# Altium PCB NS6202_V4.1.PcbDoc (part 1 of 2)
Units mm, origin at the board's own origin, x right, y up, seen from the top; angles counter-clockwise.
Board outline 63.75 x 63.6 mm, 4 copper layers (Top, VCC, GND, Bottom), stack 0.776 mm thick; 132 components, 151 nets, 534 pads, 404 vias.
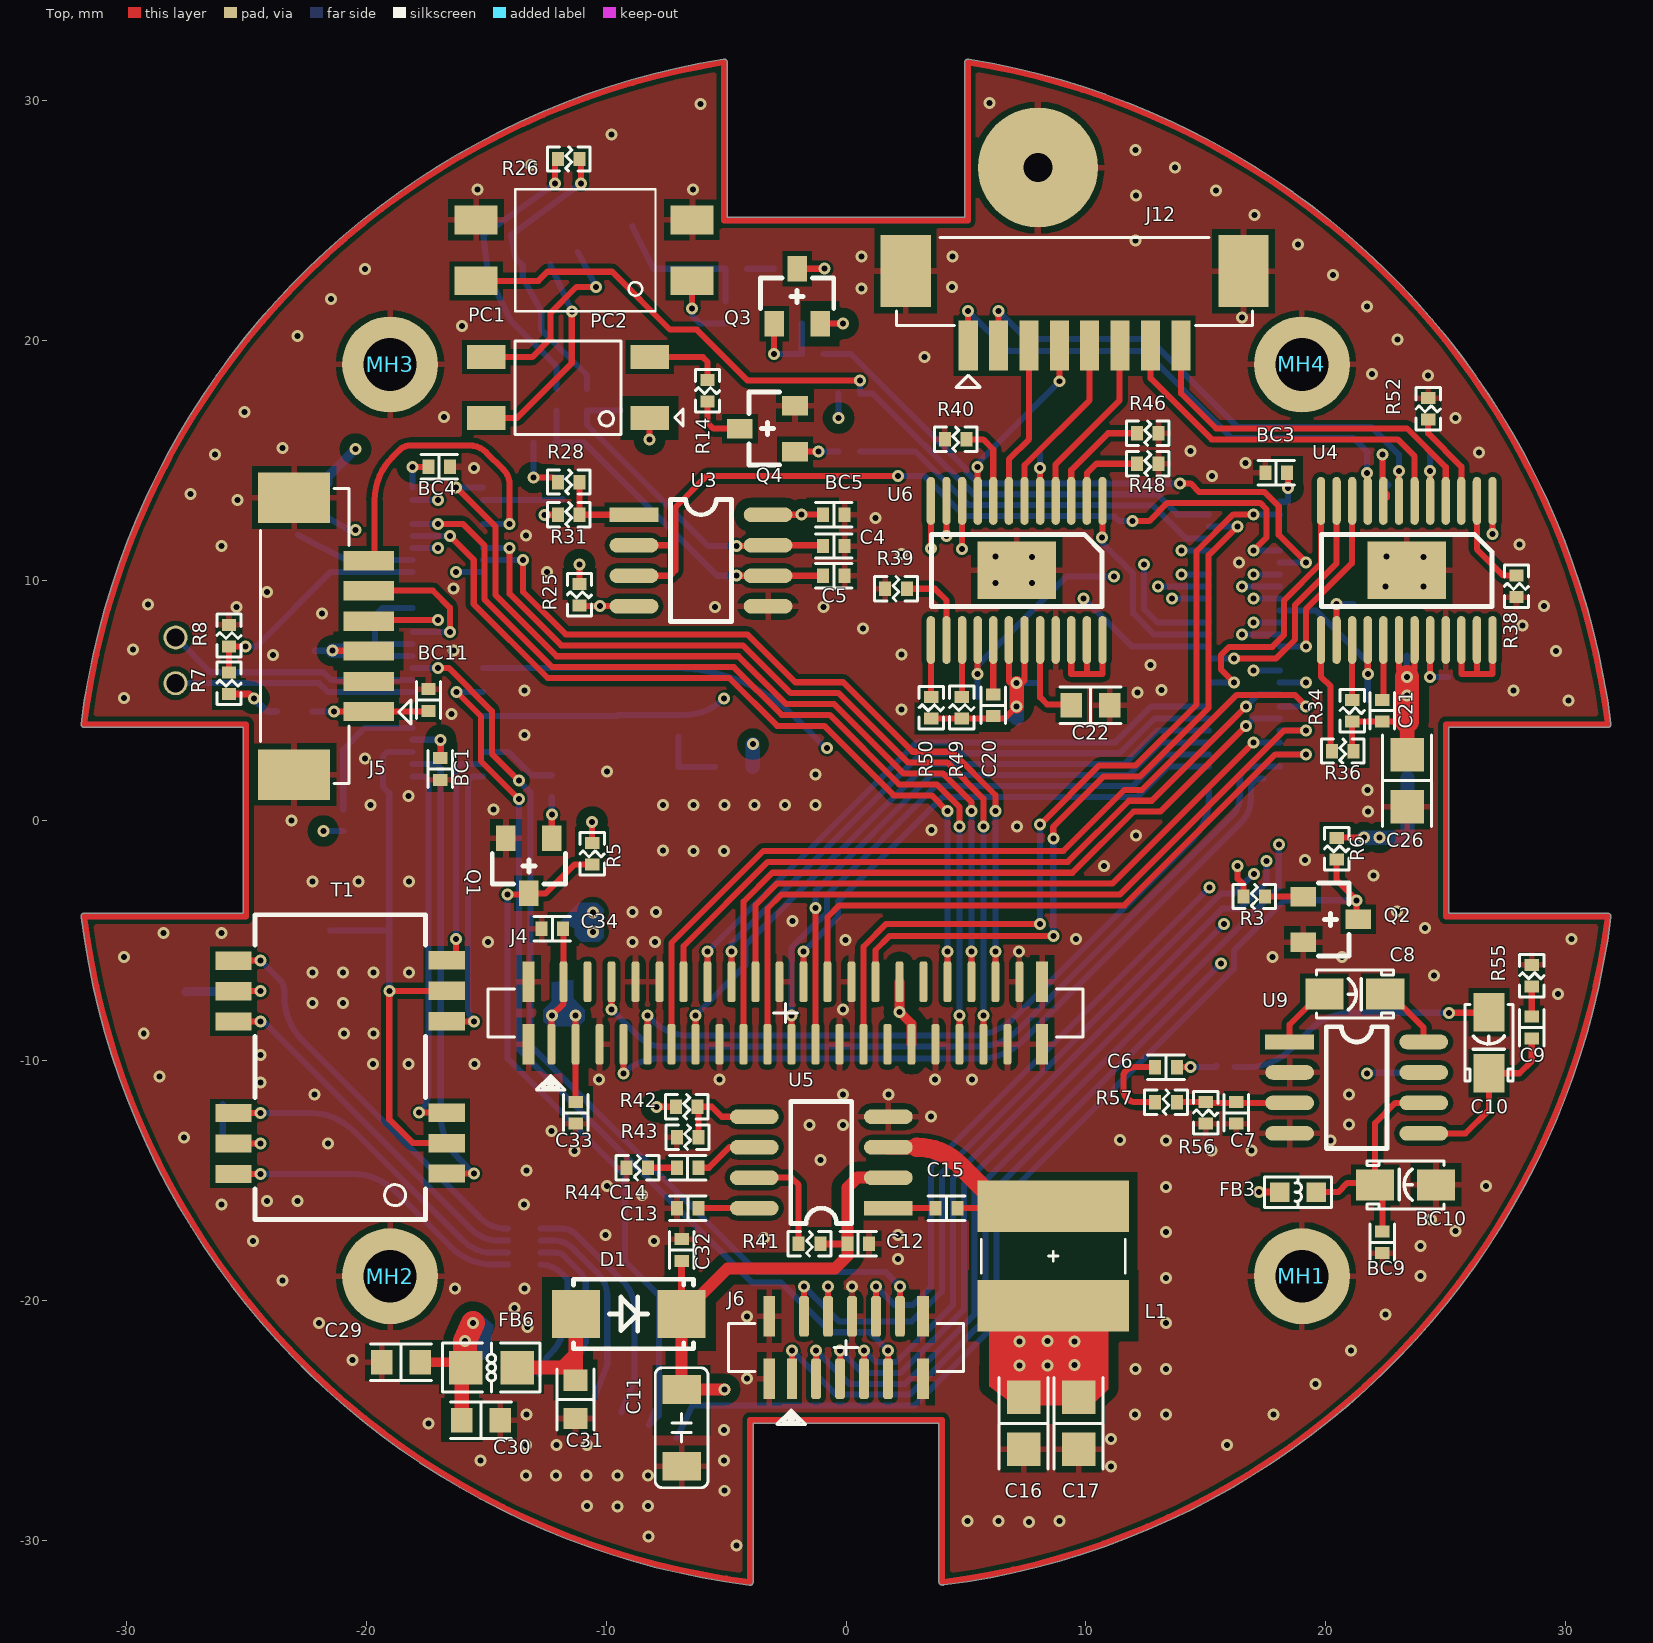
[diagram p0: Top view]
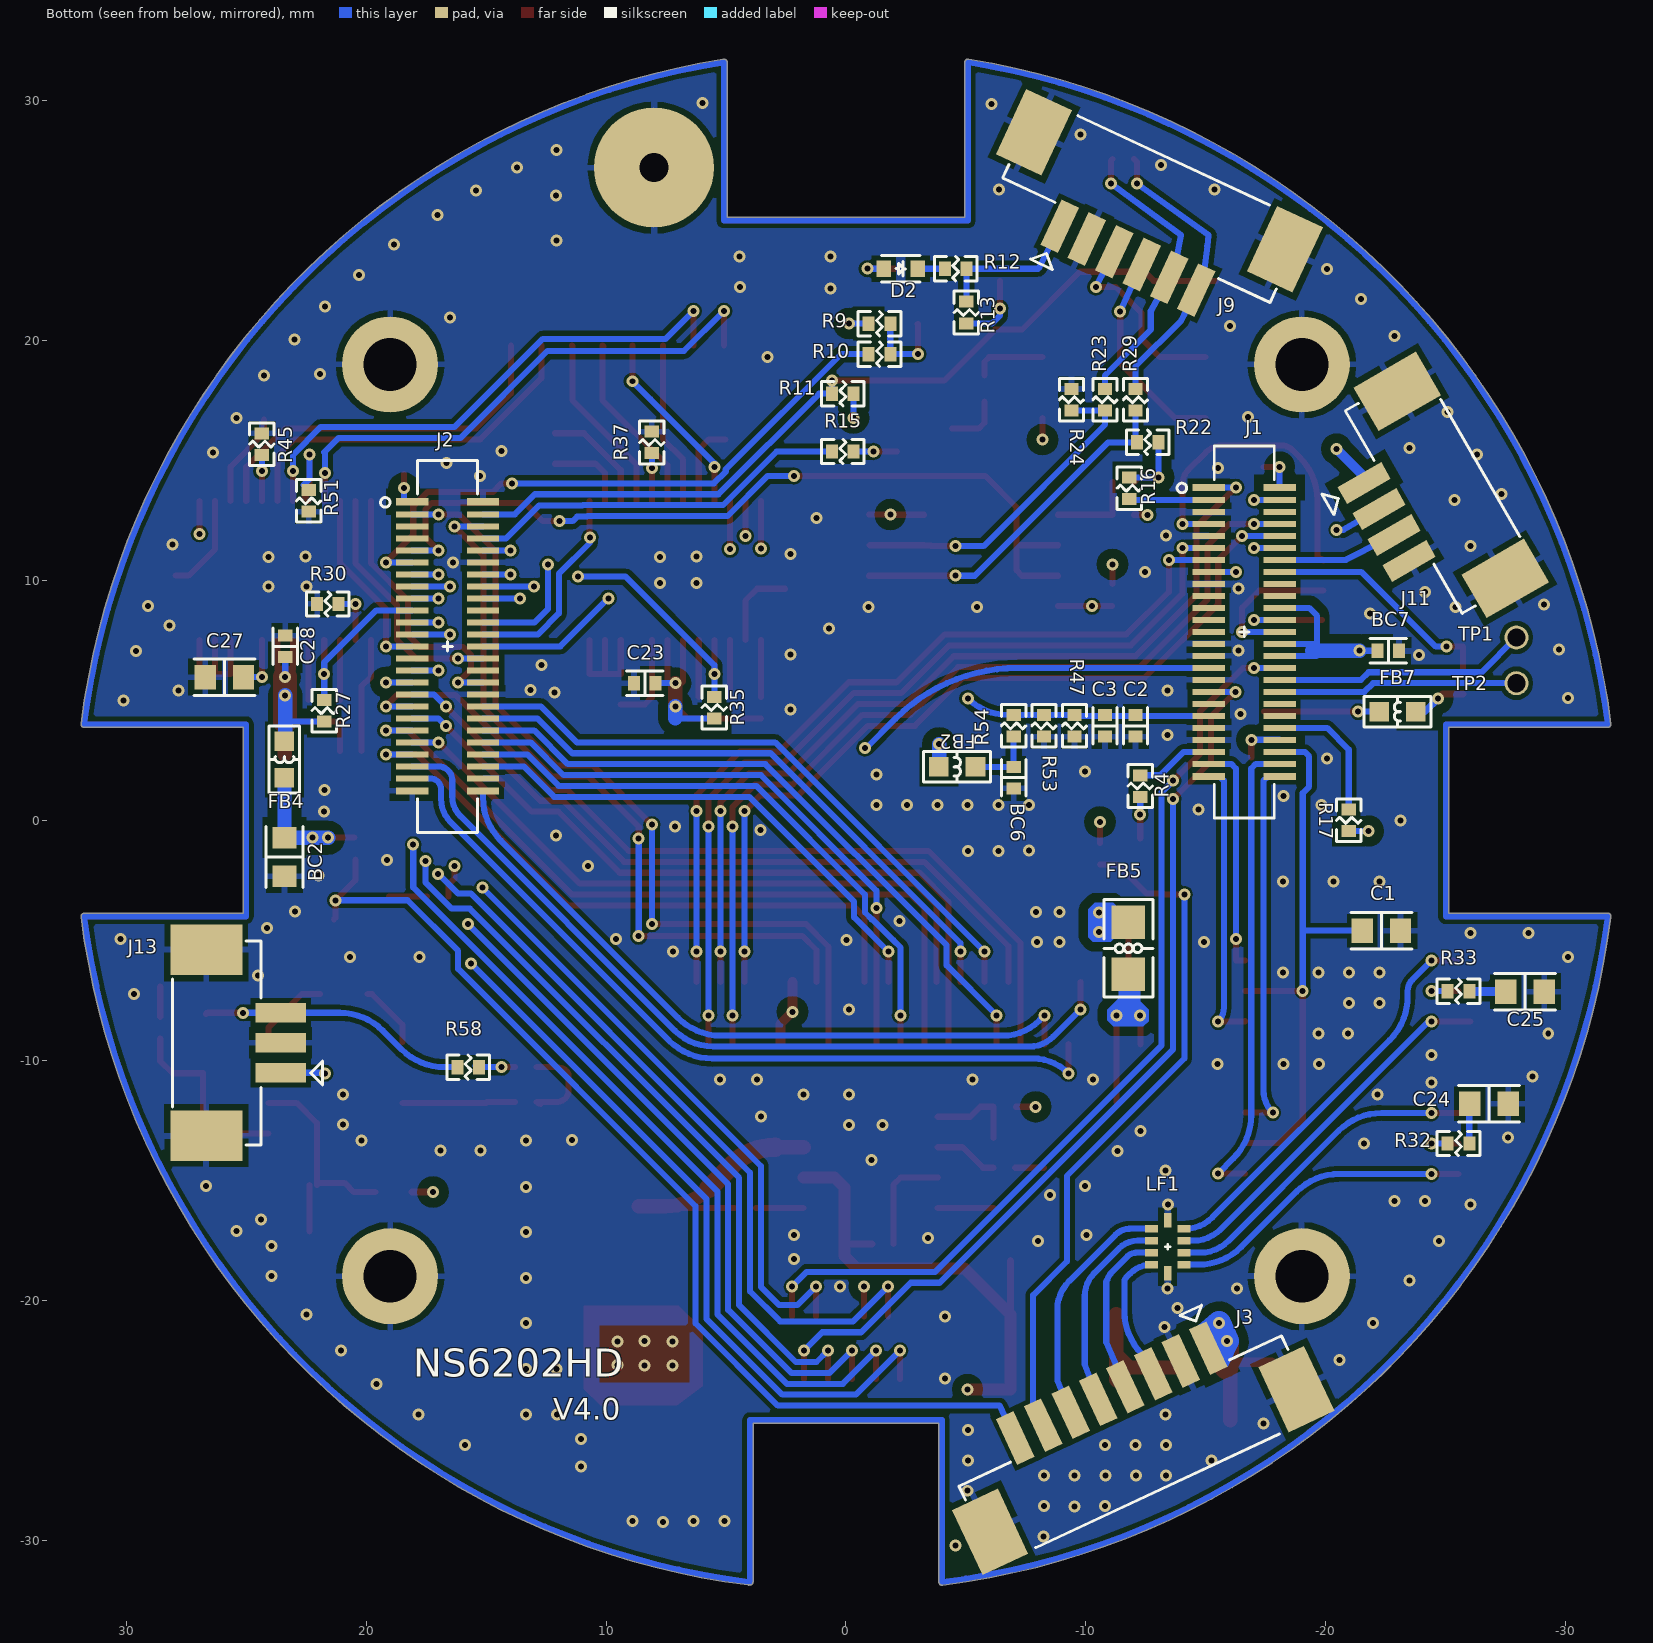
[diagram p1: Bottom view, seen from below]
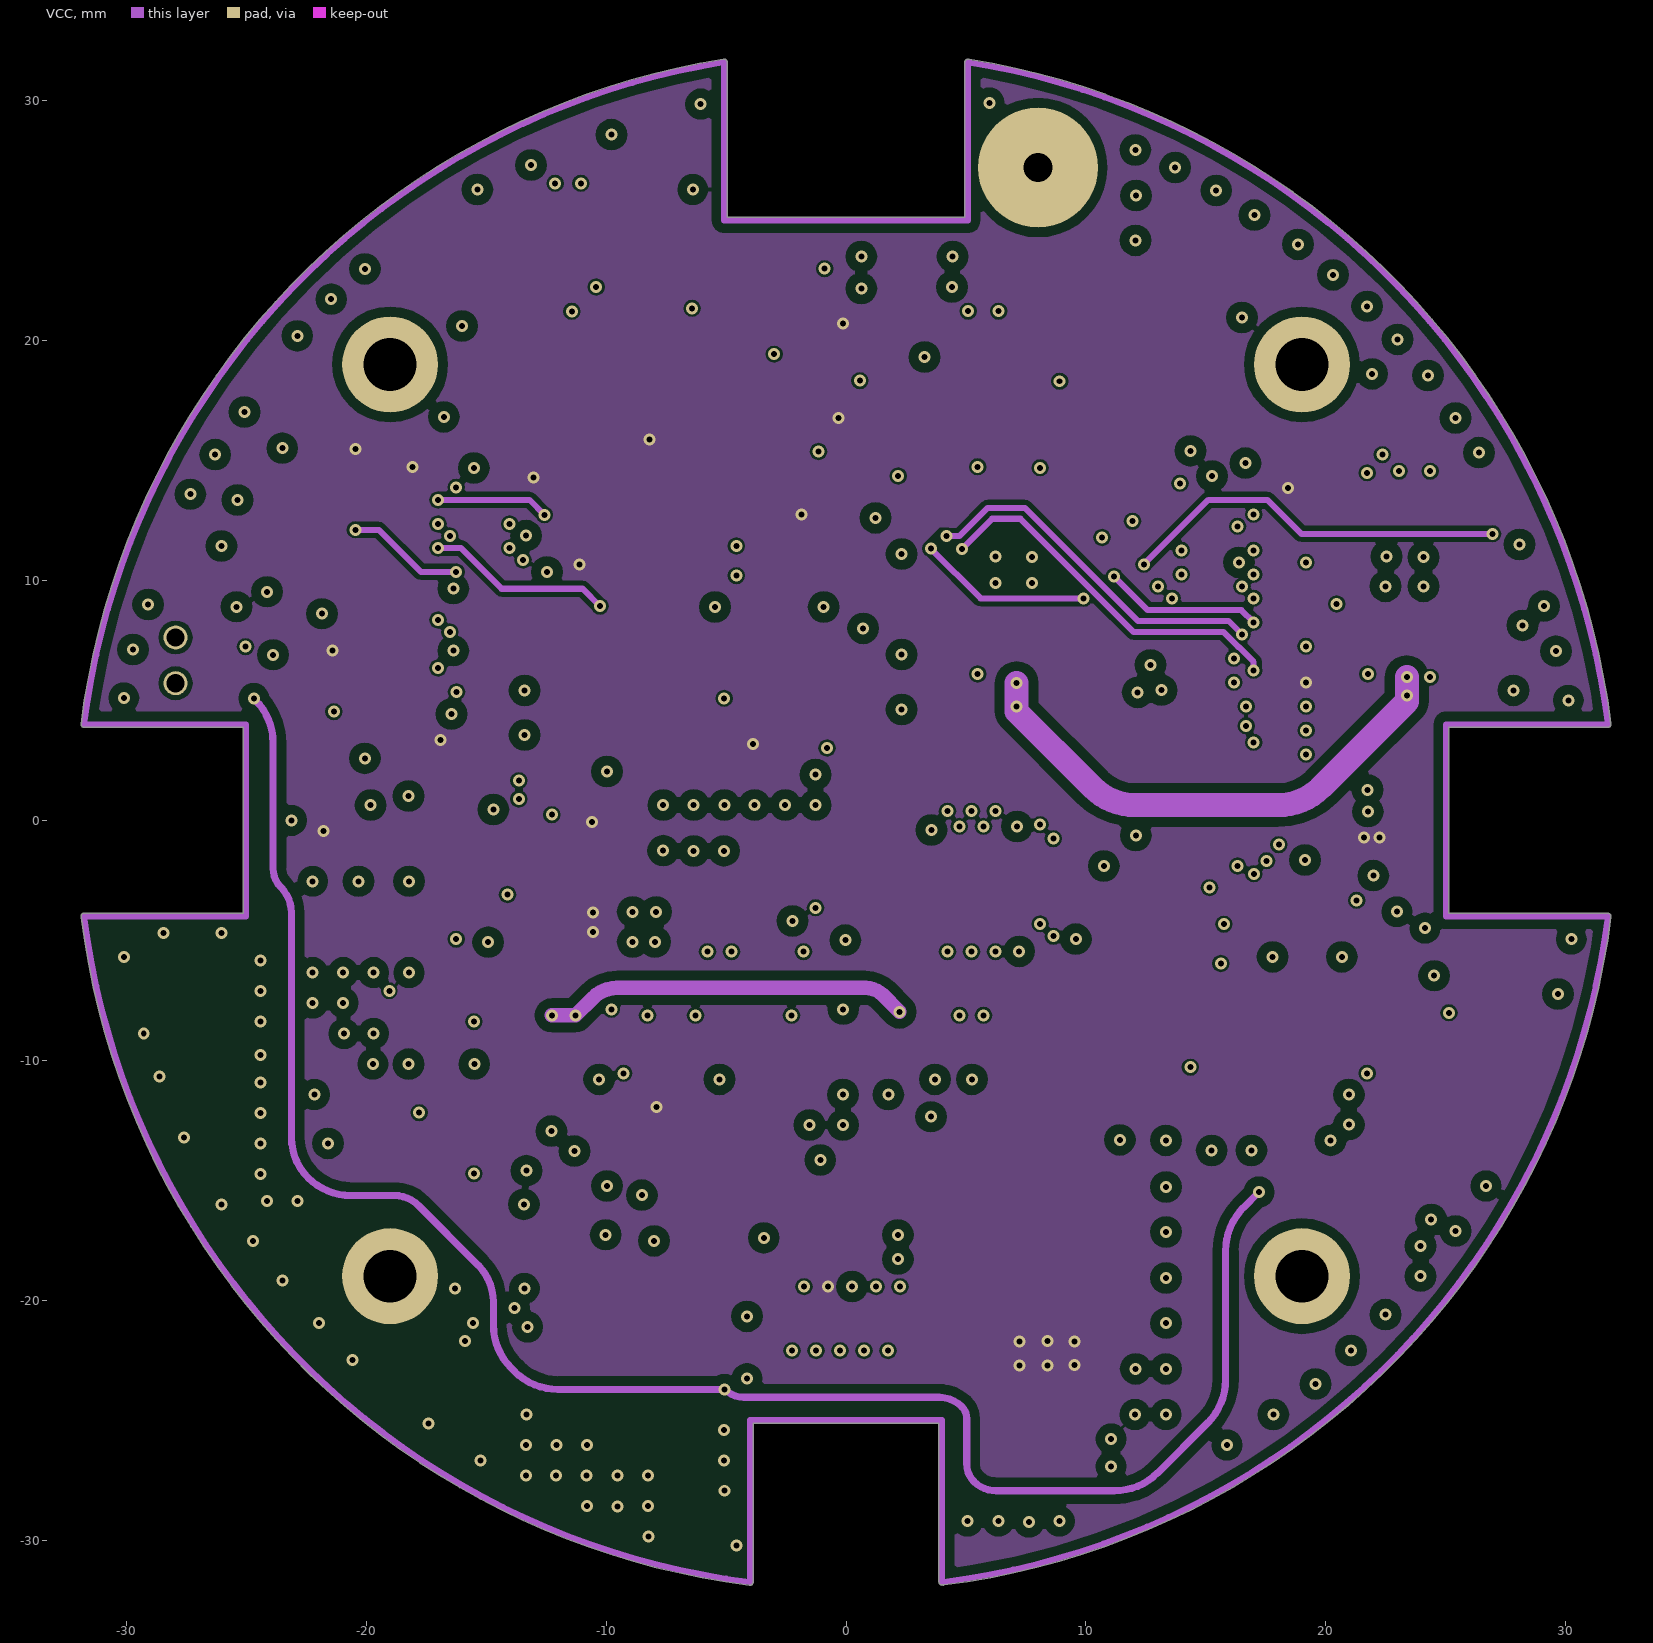
[diagram p2: VCC]
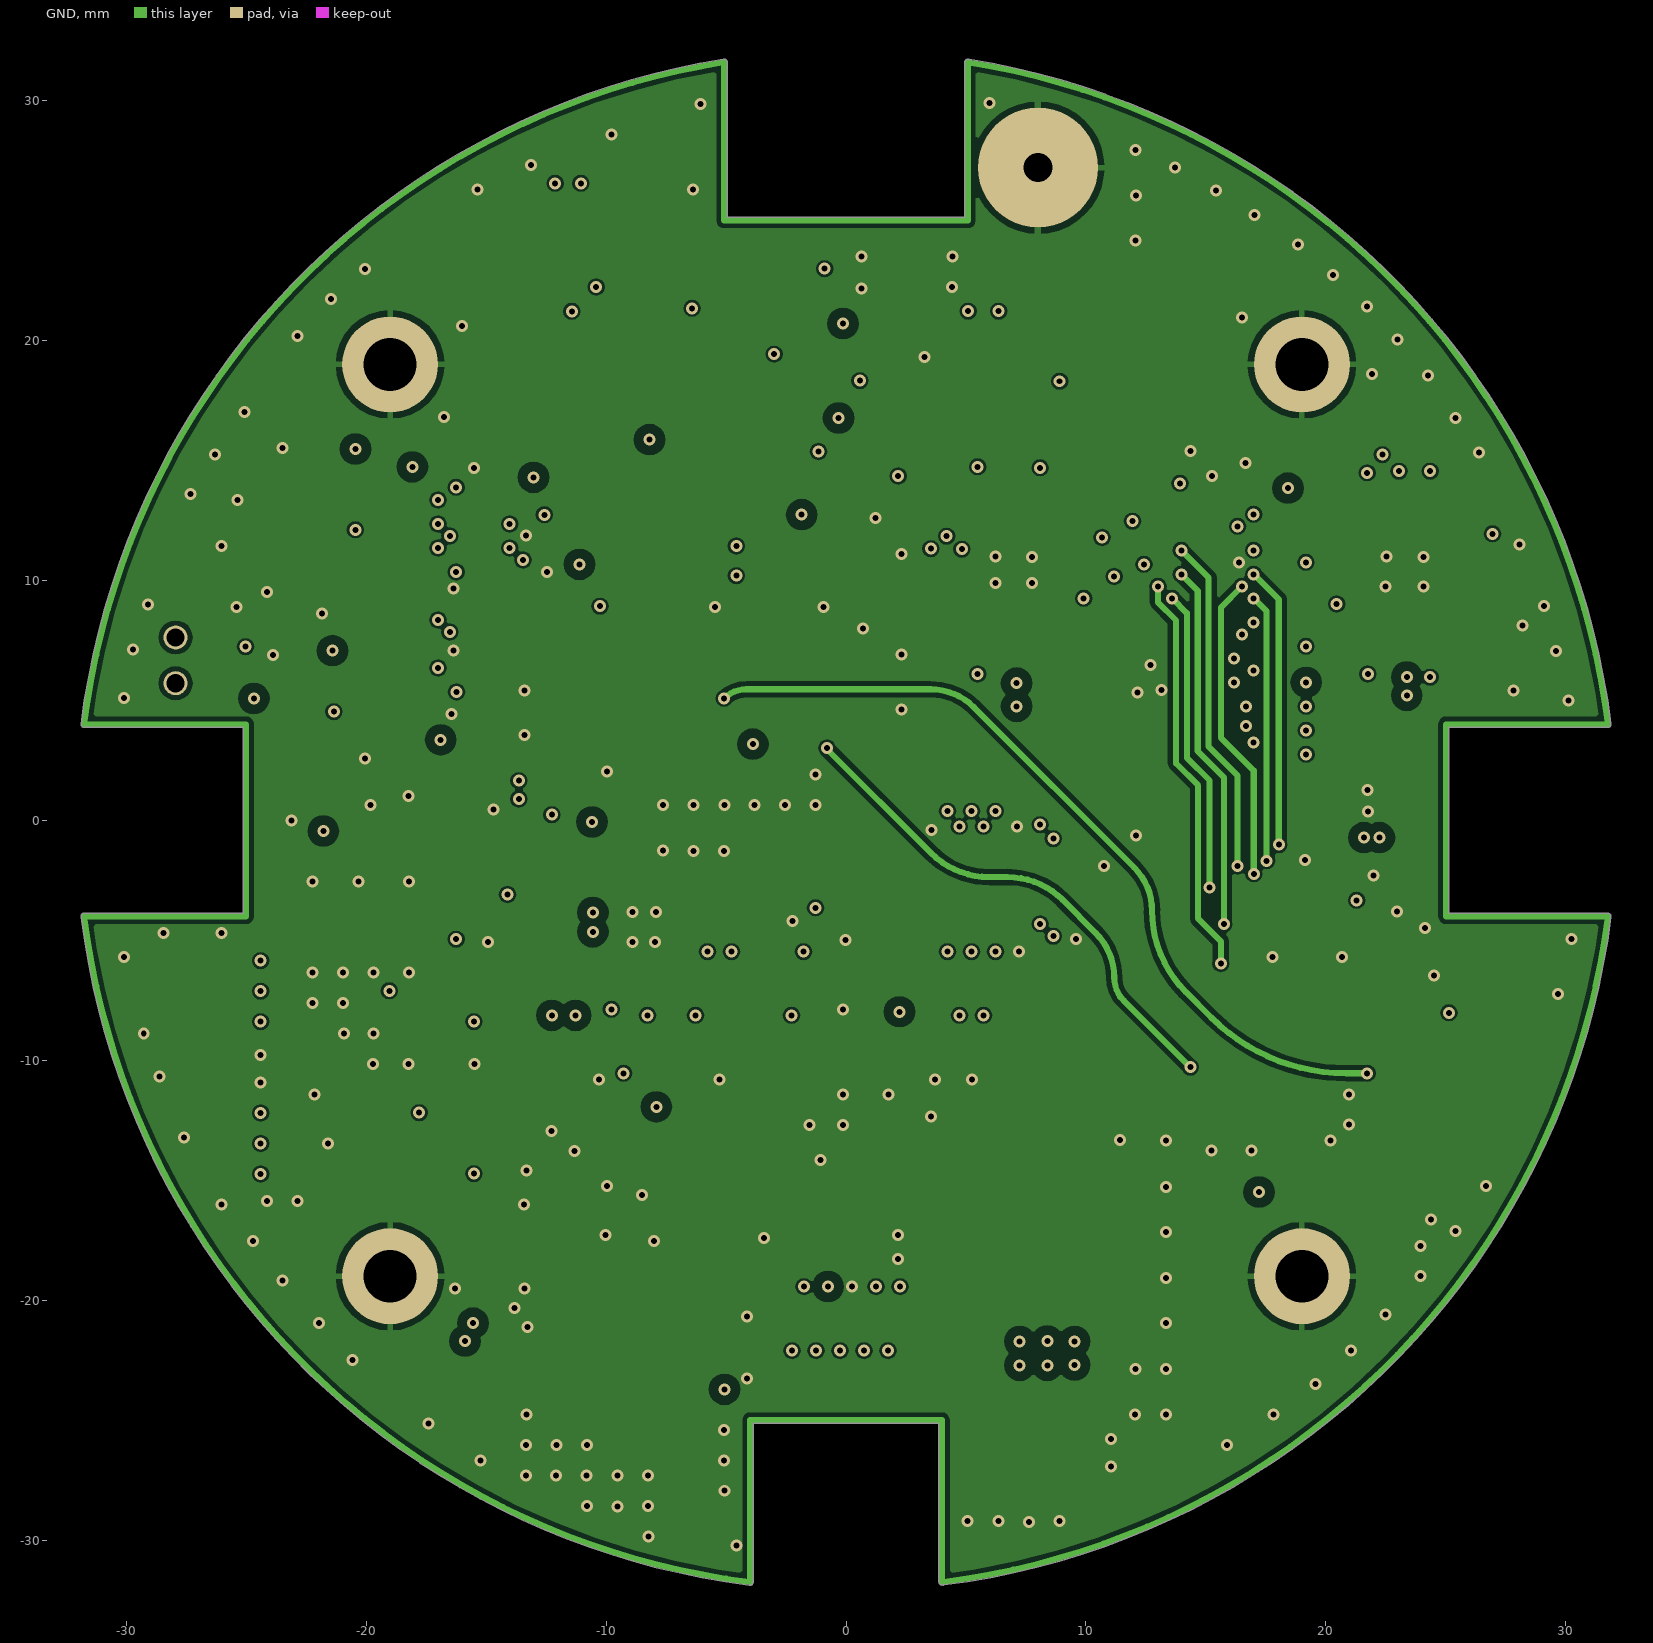
[diagram p3: GND]

## Layer stack, top to bottom
Solder Mask Top: solder mask 0.0102, Solder Resist, Dk 3.5
Top: signal copper 0.0343
Dielectric 1: core 0.254, FR-4, Dk 4.2
VCC: signal copper 0.036
Dielectric 3: prepreg 0.127, Dk 4.2
GND: signal copper 0.036
Dielectric 2: core 0.254, Dk 4.2
Bottom: signal copper 0.0343
Solder Mask Bottom: solder mask 0.0102, Solder Resist, Dk 3.5

## Board outline
-4.035,-31.873 ccw(c-4.019,-31.747) -4.01,-31.874 ccw(c-4,-31.747) -3.873,-31.747 -3.873,-25.127 3.873,-25.127 3.873,-31.741 ccw(c4,-31.741) 4.031,-31.864 ccw(c4.063,-31.741) 4.079,-31.867 ccw(c0,0) 31.873,-4.035 ccw(c31.747,-4.019) 31.874,-4.019 ccw(c31.747,-4.019) 31.874,-4.01 ccw(c31.747,-4) 31.874,-4 ccw(c31.747,-4) 31.747,-3.873 25.127,-3.873 25.127,3.873 31.747,3.873 ccw(c31.747,4) 31.874,4 ccw(c31.747,4) 31.874,4.01 ccw(c31.747,4.019) 31.874,4.019 ccw(c31.747,4.019) 31.873,4.035 ccw(c0,0) 5.12,31.717 ccw(c5.1,31.591) 5.09,31.718 ccw(c5.08,31.591) 4.953,31.591 4.953,25.127 -4.953,25.127 -4.953,31.595 ccw(c-5.08,31.595) -5.113,31.718 ccw(c0,0) -31.875,4.017 ccw(c-31.749,4.001) -31.761,3.874 ccw(c-31.741,4) -31.741,3.873 -25.127,3.873 -25.127,-3.873 -31.75,-3.873 ccw(c-31.75,-4) -31.873,-4.031 ccw(c0,0)

## Design rules (kind name [scope] priority, off if disabled: settings)
Clearance Clearance_4 [OnLayer('Keep-Out Layer') vs InNet('GND')] p1: gap=0.001 ignorepadtopadclearanceinfootprint=FALSE except(0: Arc-Hole Track-Hole SMDPad-Hole THPad-Hole Via-Hole Fill-Hole Poly-Hole Region-Hole Text-Hole)
Clearance Clearance_3 [IsRegion vs (InNet('+12V') OR InNet('+12V_POE') OR InNet('+3.3V')OR InNet('+1.8V') or Innet('+5.0V')or Innet('DC12IN')or Innet('DC12IN_CON') or innet('+3.3V_VID')or innet('MVDD'))] p2: gap=0.4 ignorepadtopadclearanceinfootprint=FALSE except(0: Arc-Hole Track-Hole SMDPad-Hole THPad-Hole Via-Hole Fill-Hole Poly-Hole Region-Hole Text-Hole)
Clearance Clearance_5 [(OnLayer('VCC') and isRegion) vs InNet('GND')] p3: gap=0.4 ignorepadtopadclearanceinfootprint=FALSE except(0: Arc-Hole Track-Hole SMDPad-Hole THPad-Hole Via-Hole Fill-Hole Poly-Hole Region-Hole Text-Hole)
Clearance Clearance_2 [(InComponent('RP6') OR InComponent('RP7') or Incomponent('LF1'))] p4: gap=0.16 ignorepadtopadclearanceinfootprint=FALSE except(0: Arc-Hole Track-Hole SMDPad-Hole THPad-Hole Via-Hole Fill-Hole Poly-Hole Region-Hole Text-Hole)
Clearance Clearance_1 [IsVia] p5: gap=0.1 ignorepadtopadclearanceinfootprint=FALSE except(0: Arc-Hole Track-Hole SMDPad-Hole THPad-Hole Via-Hole Fill-Hole Poly-Hole Region-Hole Text-Hole)
Clearance [All] p6: gap=0.2 ignorepadtopadclearanceinfootprint=FALSE except(0: Arc-Hole Track-Hole SMDPad-Hole THPad-Hole Via-Hole Fill-Hole Poly-Hole Region-Hole Text-Hole)
ComponentClearance ComponentClearance_1 [(InComponent('J5') or InComponent('J6') or InComponent('J12')) vs (InComponent('MH4') or InComponent('J8') or InComponent('J11'))] p1: gap=0 collisioncheckmode=3 verticalgap=0 showdistances=FALSE
ComponentClearance [All] p2: gap=0.01 collisioncheckmode=3 verticalgap=0.254 showdistances=FALSE
HoleSize [All] p1: absolutevalues=TRUE maxlimit=3.27 minlimit=0.025 maxpercent=80.000 minpercent=20.000
HoleToHoleClearance [All] p1: gap=0.01 allowstackedmicrovias=TRUE
MinimumSolderMaskSliver [All] p1: minsoldermaskwidth=0.01
PlaneConnect "Power Plane Connect Style - pads with no thermal_2" [(Name='U44-1') Or (Name='U45-1') Or (Name='U46-1') Or (Name='U47-1') Or (Name='U48-1') Or (Name='U49-1') Or (Name='U50-1') Or (Name='U51-1') Or (Name='U52-1') Or (Name='U55-1') Or (Name='U56-1') Or (Name='U57-1') Or (Name='U58-1') Or (Name='U6-1') Or (Name='U7-1') Or (Name='U8-1') Or (Name='U9-1')] p1: planeconnectstyle=NoConnect reliefexpansion=0.508 reliefentries=4 reliefconductorwidth=0.254 reliefairgap=0.254 // PAD - No Thermal Connect Rule
PlaneConnect "Power Plane Connect Style - pads with no thermal" [(Name='J10-0') Or (Name='J10-0/2') Or (Name='J11-0') Or (Name='J11-0/2') Or (Name='J13-6') Or (Name='J13-7') Or (Name='J2-13') Or (Name='J2-14') Or (Name='J4-15') Or (Name='J4-16') Or (Name='J6-5') Or (Name='J6-6') Or (Name='J6-9') Or (Name='J6-10') Or (Name='LS1-5') Or (Name='LS1-6') Or (Name='LS1-7') Or (Name='SW1-1') Or (Name='SW1-4') Or (Name='U10-1') Or (Name='U11-1') Or (Name='U12-1') Or (Name='U13-1') Or (Name='U14-1') Or (Name='U15-1') Or (Name='U16-1') Or (Name='U17-1') Or (Name='U18-1') Or (Name='U19-1') Or (Name='U20-1') Or (Name='U21-1') Or (Name='U22-1') Or (Name='U23-1') Or (Name='U24-1') Or (Name='U25-1') Or (Name='U26-1') Or (Name='U27-1') Or (Name='U28-1') Or (Name='U29-1') Or (Name='U30-1') Or (Name='U31-1') Or (Name='U32-1') Or (Name='U33-1') Or (Name='U34-1') Or (Name='U35-1') Or (Name='U36-1') Or (Name='U37-1') Or (Name='U38-1') Or (Name='U39-1') Or (Name='U40-1') Or (Name='U41-1') Or (Name='U42-1') Or (Name='U43-1')] p2: planeconnectstyle=NoConnect reliefexpansion=0.508 reliefentries=4 reliefconductorwidth=0.254 reliefairgap=0.254 // PAD - No Thermal Connect Rule
PlaneConnect [All] p3: planeconnectstyle=Relief reliefexpansion=0.508 reliefentries=4 reliefconductorwidth=0.254 reliefairgap=0.254
PolygonConnect PolygonConnect_1 [isVia] p1: connectstyle=Direct reliefconductorwidth=0.254 reliefentries=4 polygonreliefangle="90 Angle" airgapwidth=0.254
PolygonConnect [All] p2: connectstyle=Relief reliefconductorwidth=0.254 reliefentries=4 polygonreliefangle="90 Angle" airgapwidth=0.254
RoutingVias [All] p1: holewidth=0.25 width=0.5 viastyle="Through Hole" minholewidth=0.25 minwidth=0.5 maxholewidth=0.25 maxwidth=0.5
SilkToBoardRegionClearance [All] p1 off:
SilkToSilkClearance [All] p1: silktosilkclearance=0.01
SilkToSolderMaskClearance SilkToSolderMaskClearance_1 [OnLayer('Multi-Layer')] p1: minsilkscreentomaskgap=0 clearancetoexposedcopper=TRUE
SilkToSolderMaskClearance [IsPad] p2: minsilkscreentomaskgap=0.01 clearancetoexposedcopper=TRUE
SolderMaskExpansion [All] p1: expansion=0.102
Width Width_2 [InNet('VDD_3.3V')  or InNet('VDD_5.0V')] p1: maxlimit=3 minlimit=0.254 preferedwidth=2.4
Width Width_1 [InNet('+12V')] p2: maxlimit=1 minlimit=0.3 preferedwidth=0.5
Width [All] p3: maxlimit=1 minlimit=0.254 preferedwidth=0.254
22 further rules are at their usual default settings.

## Components (designator, comment, footprint, x,y, rotation, side; value= is the part's Value field where it differs from the comment)
BC1 "0.1uF" CS-1005 -16.907,2.14 r90 top
BC2 "0.1uF" CS-1608 23.4,-1.524 r90 bottom
BC3 "0.1uF" CS-1005 17.926,14.478 r0 top
BC4 "0.1uF" CS-1005 -16.96,14.732 r180 top
BC5 "0.1uF" CS-1005 -0.508,12.734 r180 top
BC6 "0.1uF" CS-1005 -6.985,1.778 r90 bottom
BC7 "0.1uF" CS-1005 -22.606,7.068 r0 bottom
BC9 "0.1uF" CS-1005 22.352,-17.584 r270 top
BC10 "10uF" CTS-3216 23.315,-15.192 r0 top
BC11 "0.1uF" CS-1005 -17.399,5.014 r270 top
C1 "0.1uF" CS-1608 -22.31,-4.597 r180 bottom
C2 "220pF" CS-1005 -12.065,3.937 r90 bottom
C3 "1nF" CS-1005 -10.795,3.937 r90 bottom
C4 "2.2nF" CS-1005 -0.508,11.43 r180 top
C5 "2.2nF" CS-1005 -0.508,10.194 r180 top
C6 "10nF" CS-1005 13.335,-10.287 r180 top
C7 "10nF" CS-1005 16.256,-12.192 r270 top
C8 "10uF" CTS-3216 21.209,-7.239 r180 top
C9 "47pF" CS-1005 28.575,-8.636 r270 top
C10 "22uF" CTS-3216 26.797,-9.271 r90 top
C11 "4.7uF-25V" C3216 -6.853,-25.315 r270 top
C12 "0.1uF" CS-1005 0.508,-17.653 r0 top
C13 "0.1uF" CS-1005 -6.596,-16.163 r180 top
C14 "3.3nF" CS-1005 -6.604,-14.478 r180 top
C15 "10nF" CS-1005 4.187,-16.163 r0 top
C16 "22uF-2012-6.3V" CS-2012 7.398,-25.127 r270 top
C17 "22uF-2012-6.3V" CS-2012 9.692,-25.127 r270 top
C20 "10nF" CS-1005 6.137,4.791 r270 top
C21 "10nF" CS-1005 22.352,4.572 r270 top
C22 "2.2uF" CS-1608 10.192,4.791 r0 top
C23 "0.1uF" CS-1005 8.382,5.715 r0 bottom
C24 "0.1uF" CS-1608 -26.797,-11.811 r180 bottom
C25 "0.1uF" CS-1608 -28.296,-7.137 r180 bottom
C26 "22uF" CS-2012 23.381,1.651 r270 top
C27 "2.2uF" CS-1608 25.908,5.969 r0 bottom
C28 "0.1uF" CS-1005 23.368,7.25 r90 bottom
C29 "0.1uF" CS-1608 -18.542,-22.584 r0 top
C30 "1nF" CS-1608 -15.214,-25 r180 top
C31 "0.1uF" CS-1608 -11.274,-24.13 r90 top
C32 "1nF" CS-1005 -6.853,-17.907 r90 top
C33 "0.1uF" CS-1005 -11.261,-12.192 r270 top
C34 "1nF" CS-1005 -12.237,-4.524 r180 top
D1 "RB051L-40" SOD-106 -9.059,-20.574 r0 top
D2 "1N4148" SOD-523 -2.286,22.987 r0 bottom
FB2 "60" LS-1608 -4.636,2.228 r180 bottom
FB3 "60" LS-1608 18.842,-15.494 r0 top
FB4 "60" LS-1608 23.4,2.54 r270 bottom
FB5 "60" LS-2012 -11.773,-5.334 r90 bottom
FB6 "60" LS-2012 -14.779,-22.805 r180 top
FB7 "60" LS-1608 -22.987,4.53 r0 bottom
J1 "AXK6F30547" AXK6F50547 -16.6,7.85 r270 bottom locked
J2 "AXK6F50347" AXK6F50547 16.6,7.25 r270 bottom locked
J3 "12505WS-08" 12505WS-8P#1 -11.737,-25.273 r155 bottom
J4 "05005HS-40" 05005HS-40P -2.523,-8.031 r0 top
J5 "12505WS-06" 12505WS-6P -21.447,7.675 r90 top
J6 "05005HS-40" 05005HS-10P 0,-21.971 r0 top
J9 "12505WS-06" 12505WS-6P -12.41,24.832 r205 bottom
J11 "12505WS-04//NI" 12505WS-4P -23.876,13.208 r60 bottom
J12 "12505WS-08" 12505WS-8P#2 9.525,21.336 r0 top
J13 "12505WS-03" 12505WS-3P 25.108,-9.271 r90 bottom
L1 "CDRH5D18NP-100NC-10uH" CDRH5D18NP 8.636,-18.161 r180 top
LF1 "LFA0805" LFA0805 -13.408,-17.769 r90 bottom
MH1 "4.04pi" VA-2.2 19,-19 r0 top locked
MH2 "4.04pi" VA-2.2 -19,-19 r0 top locked
MH3 "4.04pi" VA-2.2 -19,19 r0 top locked
MH4 "4.04pi" VA-2.2 19,19 r0 top locked
PC1 "PC817" PC817 -10.922,23.691 r180 top
PC2 "ASSR-4118" ASSR-4118 -11.586,18.034 r90 top
Q1 "MMBT6427" SOT-23 -13.223,-1.905 r270 top
Q2 "MMBT6427" SOT-23 20.204,-4.134 r0 top
Q3 "MMBT3906" SOT-23 -2.032,21.844 r90 top
Q4 "MMBT6427" SOT-23 -3.283,16.329 r180 top
R3 "10K" RS-1005#1 17.018,-3.175 r180 top
R4 "10K" RS-1005#1 -12.264,1.428 r90 bottom
R5 "1K" RS-1005#1 -10.583,-1.397 r270 top
R6 "1K" RS-1005#1 20.447,-1.187 r270 top
R7 "10K" RS-1005#1 -25.716,5.715 r270 top
R8 "10K" RS-1005#1 -25.716,7.7 r90 top
R9 "10K" RS-1005#1 -1.397,20.701 r180 bottom
R10 "1K" RS-1005#1 -1.397,19.431 r180 bottom
R11 "10K" RS-1005#1 0.127,17.78 r180 bottom
R12 "330" RS-1005#1 -4.572,22.987 r0 bottom
R13 "2.2K" RS-1005#1 -5.019,21.165 r270 bottom
R14 "330" RS-1005#1 -5.773,17.907 r270 top
R15 "1K" RS-1005#1 0.127,15.37 r180 bottom
R16 "10K" RS-1005#1 -11.811,13.843 r90 bottom
R17 "10K" RS-1005#1 -20.955,0 r270 bottom
R22 "10K" RS-1005#1 -12.573,15.748 r180 bottom
R23 "47" RS-1005#1 -10.795,17.526 r90 bottom
R24 "10K" RS-1005#1 -9.398,17.526 r270 bottom
R25 "10K" RS-1005#1 -11.107,9.398 r90 top
R26 "120/NI" RS-1005#1 -11.557,27.559 r0 top
R27 "4.7K" RS-1005#1 21.743,4.572 r270 bottom
R28 "10K" RS-1005#2 -11.557,14.097 r0 top
R29 "47" RS-1005#1 -12.065,17.526 r90 bottom
R30 "0" RS-1005#1 21.59,9.017 r180 bottom
R31 "100" RS-1005#1 -11.557,12.734 r0 top
R32 "75" RS-1005#1 -25.527,-13.469 r0 bottom
R33 "75" RS-1005#1 -25.527,-7.119 r0 bottom
R34 "1K" RS-1005#1 21.093,4.572 r90 top
R35 "4.7K" RS-1005#1 5.487,4.699 r270 bottom
R36 "1K" RS-1005#1 20.701,2.887 r180 top
R37 "4" RS-1005#1 8.087,15.748 r90 bottom
R38 "100" RS-1005#1 27.94,9.75 r90 top
R39 "0" RS-1005#1 2.083,9.652 r0 top
R40 "4" RS-1005#1 4.572,15.875 r180 top
R41 "100K" RS-1005#1 -1.524,-17.653 r180 top
R42 "26.1K_1%" RS-1005#1 -6.638,-11.938 r0 top
R43 "10K_1%" RS-1005#1 -6.604,-13.203 r0 top
R44 "2.2K" RS-1005#1 -8.694,-14.478 r0 top
R45 "4" RS-1005#1 24.343,15.679 r90 bottom
R46 "100" RS-1005#1 12.573,16.129 r180 top
R47 "2.2K" RS-1005#1 -9.525,3.937 r90 bottom
R48 "100" RS-1005#1 12.573,14.859 r180 top
R49 "1K" RS-1005#1 4.826,4.699 r90 top
R50 "1K" RS-1005#1 3.556,4.691 r90 top
R51 "4" RS-1005#1 22.393,13.314 r270 bottom
R52 "100" RS-1005#1 24.257,17.145 r270 top
R53 "2.2K//NI" RS-1005#1 -8.255,3.937 r90 bottom
R54 "2.2K" RS-1005#1 -6.985,3.937 r270 bottom
R55 "10" RS-1005#1 28.575,-6.477 r270 top
R56 "10K" RS-1005#1 14.986,-12.192 r90 top
R57 "1K" RS-1005#1 13.335,-11.742 r0 top
R58 "0/NI" RS-1005#1 15.748,-10.287 r0 bottom
T1 "TRC41604NL" TRC41604NL -21.082,-10.287 r90 top
TP1 "TP" TP -27.94,7.62 r90 bottom
TP2 "TP" TP -27.94,5.715 r90 bottom
U3 "MAX3485ESA" SOIC-8 -6.057,10.795 r270 top
U4 "DRV8834PWP" TSSOP-24-PAD 23.368,10.414 r270 top
U5 "MP1482" SOIC-8 -1.016,-14.224 r90 top
U6 "DRV8834PWP" TSSOP-24-PAD 7.112,10.414 r270 top
U9 "LM386M-1" SOIC-8 21.266,-11.176 r270 top

## Footprints (in the part's own frame and the unit in brackets; to place one, negate y for a bottom-side part, rotate by r counter-clockwise, add the part's x,y. Pads: shape width x height; smd on the part's side, far side on the other; paste and mask are expansions set on the pad)
05005HS-10P [mm]
  rect 0.4x1.7 smd: 1(-2.25,-1.3)
  rrect50% 0.4x1.7 smd: 2(-1.75,1.3) 3(-1.25,-1.3) 4(-0.75,1.3) 5(-0.25,-1.3) 6(0.25,1.3) 7(0.75,-1.3) 8(1.25,1.3) 9(1.75,-1.3) 10(2.25,1.3)
  rect 0.5x1.7 smd: M1(-3.2,1.3) M2(-3.2,-1.3) M3(3.2,1.3) M4(3.2,-1.3)
  silkscreen extent -4.9,-3.2 4.9,1
05005HS-40P [mm]
  rrect50% 0.32x1.7 smd: 1(-9.75,-1.3) 2(-9.25,1.3) 3(-8.75,-1.3) 4(-8.25,1.3) 5(-7.75,-1.3) 6(-7.25,1.3) 7(-6.75,-1.3) 8(-6.25,1.3) 9(-5.75,-1.3) 10(-5.25,1.3) 11(-4.75,-1.3) 12(-4.25,1.3) 13(-3.75,-1.3) 14(-3.25,1.3) 15(-2.75,-1.3) 16(-2.25,1.3) 17(-1.75,-1.3) 18(-1.25,1.3) 19(-0.75,-1.3) 20(-0.25,1.3) 21(0.25,-1.3) 22(0.75,1.3) 23(1.25,-1.3) 24(1.75,1.3) 25(2.25,-1.3) 26(2.75,1.3) 27(3.25,-1.3) 28(3.75,1.3) 29(4.25,-1.3) 30(4.75,1.3) 31(5.25,-1.3) 32(5.75,1.3) 33(6.25,-1.3) 34(6.75,1.3) 35(7.25,-1.3) 36(7.75,1.3) 37(8.25,-1.3) 38(8.75,1.3) 39(9.25,-1.3) 40(9.75,1.3)
  rect 0.5x1.7 smd: M1(-10.7,1.3) M2(-10.7,-1.3) M3(10.7,1.3) M4(10.7,-1.3)
  silkscreen extent -12.4,-3.2 12.4,1
12505WS-3P [mm]
  rect 0.8x2.1 smd: 1(-1.25,-1.55) 2(0,-1.55) 3(1.25,-1.55)
  rect 2.1x3 smd: 4(-3.87,1.55) 5(3.87,1.55)
  silkscreen extent -4.26,-3.3 4.24,2.95
12505WS-4P [mm]
  rect 0.8x2.1 smd: 1(1.875,1.55) 2(0.625,1.55) 3(-0.625,1.55) 4(-1.875,1.55)
  rect 2.1x3 smd: 5(-4.5,-1.55) 6(4.5,-1.55)
  silkscreen extent -4.87,-2.95 4.87,3.3
12505WS-6P [mm]
  rect 0.8x2.1 smd: 1(-3.145,-1.55) 2(-1.895,-1.55) 3(-0.625,-1.55) 4(0.625,-1.55) 5(1.895,-1.55) 6(3.145,-1.55)
  rect 2.1x3 smd: M1(-5.77,1.55) M2(5.77,1.55)
  silkscreen extent -6.14,-3.31 6.15,2.95
12505WS-8P#1 [mm]
  rect 0.8x2.1 smd: 1(4.435,1.55) 2(3.165,1.55) 3(1.895,1.55) 4(0.625,1.55) 5(-0.625,1.55) 6(-1.895,1.55) 7(-3.165,1.55) 8(-4.435,1.55)
  rect 2.1x3 smd: 9(7.04,-1.55) 10(-7.04,-1.55)
  silkscreen extent -7.41,-2.95 7.42,3.29
12505WS-8P#2 [mm]
  rect 0.8x2.1 smd: 1(-4.435,-1.55) 2(-3.165,-1.55) 3(-1.895,-1.55) 4(-0.625,-1.55) 5(0.625,-1.55) 6(1.895,-1.55) 7(3.165,-1.55) 8(4.435,-1.55)
  rect 2.1x3 smd: 9(-7.04,1.55) 10(7.04,1.55)
  silkscreen extent -7.41,-3.29 7.41,2.95
ASSR-4118 [mm]
  rect 1x1.6 smd: 1(-1.27,-3.4) 2(1.27,-3.4) 3(1.27,3.4) 4(-1.27,3.4)
  silkscreen extent -1.95,-4.8 1.95,2.2
AXK6F50547 [mm]
  rect 0.3x1.35 smd: 1(-6.025,-1.475) 2(-6.025,1.475) 49(6.025,-1.475) 50(6.025,1.475)
  rect 0.25x1.35 smd: 3(-5.5,-1.475) 4(-5.5,1.475) 5(-5,-1.475) 6(-5,1.475) 7(-4.5,-1.475) 8(-4.5,1.475) 9(-4,-1.475) 10(-4,1.475) 11(-3.5,-1.475) 12(-3.5,1.475) 13(-3,-1.475) 14(-3,1.475) 15(-2.5,-1.475) 16(-2.5,1.475) 17(-2,-1.475) 18(-2,1.475) 19(-1.5,-1.475) 20(-1.5,1.475) 21(-1,-1.475) 22(-1,1.475) 23(-0.5,-1.475) 24(-0.5,1.475) 25(0,-1.475) 26(0,1.475) 27(0.5,-1.475) 28(0.5,1.475) 29(1,-1.475) 30(1,1.475) 31(1.5,-1.475) 32(1.5,1.475) 33(2,-1.475) 34(2,1.475) 35(2.5,-1.475) 36(2.5,1.475) 37(3,-1.475) 38(3,1.475) 39(3.5,-1.475) 40(3.5,1.475) 41(4,-1.475) 42(4,1.475) 43(4.5,-1.475) 44(4.5,1.475) 45(5,-1.475) 46(5,1.475) 47(5.5,-1.475) 48(5.5,1.475)
  silkscreen extent -7.75,-2.8 7.75,1.25
C3216 [mm]
  rect 1.2x1.6 smd: 1(-1.6,0) 2(1.6,0)
  silkscreen extent -2.5,-1.1 2.5,1.1
CDRH5D18NP [mm]
  rect 6.3x2.15 smd: 1(0,-2.075) 2(0,2.075)
  silkscreen extent -3,-0.7 3,0.7
CS-1005 [mm]
  rect 0.5x0.6 smd: 1(-0.45,0) 2(0.45,0)
  silkscreen extent -0.76,-0.51 0.76,0.51
CS-1608 [mil]
  rect 35x40 smd: 1(-31.5,0) 2(31.5,0)
  silkscreen extent -50,-30 50,30
CS-2012 [mil]
  rect 55x55 smd: 1(-42.5,0) 2(42.5,0)
  silkscreen extent -75,-40 75,40
CTS-3216 [mil]
  rect 63x51 smd: 1(-50,0) 2(50,0)
  silkscreen extent -63,-39 63,39
LFA0805 [mm]
  rect 0.305x0.55 smd: 1(-0.75,0.68) 2(-0.75,-0.68) 3(-0.25,0.68) 4(-0.25,-0.68) 5(0.25,0.68) 6(0.25,-0.68) 7(0.75,0.68) 8(0.75,-0.68)
  rect 0.6x0.305 smd: 9(1.1,0) 10(-1.1,0)
  silkscreen extent -0.1,-0.1 0.1,0.1
LS-1608 [mil]
  rect 32x32 smd: 1(-30,0) 2(30,0)
  silkscreen extent -55,-25 55,25
LS-2012 [mil]
  rect 55x55 smd: 1(-42.5,0) 2(42.5,0)
  silkscreen extent -80,-40 80,40
PC817 [mm]
  rect 1.8x1.2 smd: 1(-4.506,1.208) 2(-4.506,-1.332) 3(4.494,-1.332) 4(4.494,1.208)
  silkscreen extent -2.98,-2.6 2.86,2.48
RS-1005#1 [mm]
  rect 0.5x0.6 smd: 1(-0.45,0) 2(0.45,0)
  silkscreen extent -0.89,-0.51 0.89,0.51
RS-1005#2 [mm]
  rect 0.5x0.6 smd: 1(0.45,0) 2(-0.45,0)
  silkscreen extent -0.89,-0.51 0.89,0.51
SOD-106 [mm]
  rrect0% 2x2 smd: 1(-2.2,0) 2(2.2,0)
  silkscreen extent -2.3,-1.45 2.7,1.45
SOD-523 [mm]
  rect 0.6x0.7 smd: 1(0.71,0) 2(-0.71,0)
  silkscreen extent -0.8,-0.55 0.8,0.55
SOIC-8 [mil]
  rect 24x80 smd: 1(-76.34,-109.45)
  oval 24x80 smd: 2(-26.34,-109.45) 3(23.66,-109.45) 4(73.66,-109.45) 5(73.66,110.55) 6(23.66,110.55) 7(-26.34,110.55) 8(-76.34,110.55)
  silkscreen extent -101,-49 99,51
SOT-23 [mil]
  rect 42x32 smd: 1(-45.45,37.75) 2(-45.45,-37.35) 3(44.85,0.2)
  silkscreen extent -20,-60 30,60
TP [mm]
  round 1 hole 0.762: 1(0,0)
TRC41604NL [mm]
  rect 0.76x1.52 smd: 1(-4.436,-4.445) 2(-3.168,-4.445) 3(-1.898,-4.445) 6(1.912,-4.445) 7(3.182,-4.445) 8(4.452,-4.445) 9(4.438,4.445) 10(3.168,4.445) 11(1.898,4.445) 14(-1.912,4.445) 15(-3.182,4.445) 16(-4.452,4.445)
  silkscreen extent -6.35,-3.56 6.35,3.56
TSSOP-24-PAD [mm] "TSOP, 16-Leads, Body 5x4.4mm, Pitch 0.65mm, IPC Low Density"
  oval 2x0.35 smd: 1(-2.9,3.575) 2(-2.9,2.925) 3(-2.9,2.275) 4(-2.9,1.625) 5(-2.9,0.975) 6(-2.9,0.325) 7(-2.9,-0.325) 8(-2.9,-0.975) 9(-2.9,-1.625) 10(-2.9,-2.275) 11(-2.9,-2.925) 12(-2.9,-3.575) 13(2.9,-3.575) 14(2.9,-2.925) 15(2.9,-2.275) 16(2.9,-1.625) 17(2.9,-0.975) 18(2.9,-0.325) 19(2.9,0.325) 20(2.9,0.975) 21(2.9,1.625) 22(2.9,2.275) 23(2.9,2.925) 24(2.9,3.575)
  rect 2.4x3.28 smd: 25(0,0)
  silkscreen extent -1.5,-3.56 1.5,3.56
VA-2.2 [mm]
  rrect100% 4x4 hole 2.2: 1(0,0)

## Free pads (board coordinates)
  round 5 hole 1.2: 0(8.001,27.203)

## Via types
v1: diameter 0.5, hole 0.25, Top to Bottom, tented both sides, 403 vias
v2: diameter 0.5, hole 0.25, Top to Bottom, 1 vias

## Nets (pads, with @x,y where several pads share a name; then routed paths per layer and width w, separated by ;. In a path a pad name is that pad's centre, name@x,y a point inside that pad or via, vN(x,y) a via of type N, cw(c..) or ccw(c..) an arc to the next point about the centre after c; other vN are vias at no path point)
+3.3V: BC1.2 BC2.2 BC3.2 BC4.2 BC5.2 BC7.2 C16.1 C17.1 FB2.1 FB4.2 FB5.2 J1.2 J1.22 J1.28 J1.30 J1.44 J2.1 J2.31 J5.3 J6.4 J11.1 L1.2 PC2.1 Q3.2 R5.1 R6.1 R9.1 R11.2 R16.2 R17.2 R22.2 R25.2 R28.2 R42.1 U3.8 | length 38.8
  Top w0.254: v1(-21.4,7.068) J5.3@-19.915,7.068 ; v1(-18.075,14.732) BC4.2@-17.41,14.732 ; BC1.2@-16.891,2.623 v1(-16.891,3.356) ; v1(-13.023,14.293) -12.203,14.293 R28.2@-12.007,14.097 ; R25.2@-11.107,9.848 v1(-11.107,10.668) ; R5.1@-10.583,-0.947 v1(-10.583,-0.065) ; v1(-8.186,15.864) PC2.1@-8.186,16.764 ; v1(-7.908,-11.938) R42.1@-7.088,-11.938 ; U3.8@-3.249,12.734 -1.852,12.734 v1(-1.847,12.739) BC5.2@-0.969,12.739 ; Q3.2@-1.083,20.701 v1(-0.127,20.701) ; J6.4@-0.75,-20.671 v1(-0.75,-19.431) ; v1(18.415,13.843) BC3.2@18.415,14.439 ; R6.1@20.487,-0.724 v1(21.58,-0.724)
  Bottom w0.254: BC7.2@-22.156,7.068 v1(-21.4,7.068) ; v1(-21.786,-0.45) R17.2@-20.955,-0.45 ; -19.633,7.298 -19.633,8.521 -19.304,8.85 J1.22@-18.075,8.85 ; -19.605,6.85 J1.30@-18.075,6.85 ; -19.581,7.35 J1.28@-18.075,7.35 ; J1.44@-18.075,3.35 -18.069,3.356 v1(-16.891,3.356) ; J1.2@-18.075,13.875 v1(-18.075,14.732) ; R22.2@-13.023,15.748 v1(-13.023,14.293) R16.2@-11.811,14.293 ; R9.1@-0.947,20.701 v1(-0.127,20.701) ; R11.2@-0.323,17.78 -0.315,17.772 -0.315,16.771 v1(-0.308,16.764) ; J2.31@18.075,5.75 19.175,5.75 v1(19.177,5.753) ; J2.1@18.075,13.275 18.415,13.275 v1(18.415,13.843)
  Bottom w0.4: J11.1@-21.596,14.057 -21.596,14.325 v1(-20.447,15.475)
  Bottom w0.6: v1(-21.4,7.068) -19.431,7.068 ; FB2.1@-3.883,2.237 v1(-3.883,3.175) ; v1(21.58,-0.724) v1(22.225,-0.724) BC2.2@23.4,-0.724 FB4.2@23.4,1.778
  other v1: 7.239,-22.714 8.388,-22.714 9.525,-22.695 7.239,-21.717 8.388,-21.698 9.525,-21.717 -10.552,-4.648 -10.552,-3.842
+3.3V_VID: C33.1 C34.1 FB5.1 J4.1 J4.2 J4.3 J4.30 J4.31 | length 26.7
  Top w0.254: J4.1@-12.273,-9.331 v1@-12.273,-8.153 ; v1(-12.264,-8.128) -11.773,-7.637 J4.2@-11.773,-6.731 C34.1@-11.773,-4.538 ; C33.1@-11.273,-11.73 J4.3@-11.273,-9.331 v1(-11.273,-8.128) v1@-11.273,-8.081
  Top w0.4: J4.30@2.227,-6.731 v1(2.227,-7.978) 2.727,-8.478 J4.31@2.727,-9.331
  VCC w0.6: v1(-12.264,-8.128) v1(-11.273,-8.128) -10.541,-7.396 cw(c-9.549,-8.388) -9.549,-6.985 0.824,-6.985 cw(c0.824,-7.975) 1.524,-7.275 v1(2.227,-7.978)
+12V: C11.1 C12.1 C32.1 D1.2 FB3.1 FB7.1 R7.2 R41.1 U5.2 | length 101.4
  Top w0.3: R7.2@-25.716,5.265 -24.865,5.265 v1(-24.68,5.08) ; D1.2@-6.853,-20.568 C32.1@-6.853,-18.357 ; R41.1@-1.074,-17.653 C12.1@0.058,-17.653 ; v1(17.21,-15.494) FB3.1@18.08,-15.494
  Top w0.5: v2(-5.063,-23.715) C11.1@-6.853,-23.715 -6.853,-20.59 -4.932,-18.669 -0.45,-18.669 0.058,-18.161 C12.1@0.058,-17.653 0.058,-15.309 0.474,-14.893 U5.2@1.764,-14.893
  VCC w0.3: v1(-24.68,5.08) -24.62,5.02 cw(c-26.416,3.224) -23.876,3.224 -23.876,-2.003 ccw(c-22.744,-2.003) -23.826,-2.336 ccw(c-22.744,-2.003) -23.544,-2.803 cw(c-24.588,-3.847) -23.112,-3.847 -23.112,-13.228 ccw(c-20.757,-13.228) -22.422,-14.893 ccw(c-20.626,-13.097) -20.626,-15.637 -18.809,-15.637 cw(c-18.809,-17.019) -17.832,-16.042 -15.333,-18.541 cw(c-16.868,-20.076) -14.697,-20.076 -14.697,-21.03 ccw(c-12.157,-21.03) -13.954,-22.826 -13.809,-22.971 ccw(c-12.013,-21.175) -12.013,-23.715 v2(-5.063,-23.715) ccw(c-4.263,-22.915) -4.263,-24.046 3.886,-24.046 cw(c3.886,-25.375) 4.129,-24.068 cw(c3.886,-25.375) 4.826,-24.435 cw(c4.323,-24.939) 5.035,-24.939 5.035,-26.836 ccw(c6.057,-26.836) 5.334,-27.559 ccw(c6.254,-26.639) 6.254,-27.94 11.191,-27.94 ccw(c11.191,-25.4) 11.917,-27.834 ccw(c11.191,-25.4) 12.987,-27.196 15.074,-25.109 ccw(c13.278,-23.313) 15.818,-23.313 15.818,-17.938 cw(c18.358,-17.938) 16.562,-16.142 v1(17.21,-15.494)
  Bottom w0.3: v1(-24.68,5.08) -24.13,4.53 FB7.1@-23.749,4.53
AIN: C2.2 C3.2 J1.39 J13.1 R47.2 R53.2 R54.1 | length 46.6
  GND w0.254: v1(-5.08,5.08) cw(c-4.16,4.16) -4.16,5.461 3.529,5.461 cw(c3.529,2.921) 5.326,4.717 12.008,-1.965 cw(c10.212,-3.761) 12.752,-3.761 ccw(c17.546,-3.761) 14.156,-7.151 ; 14.156,-7.151 15.222,-8.217 ccw(c20.832,-2.606) 20.832,-10.541 v1(21.717,-10.541)
  Bottom w0.254: J1.39@-15.125,4.35 R47.2@-9.525,4.35 ; R47.2@-9.525,4.387 -6.753,4.387 ccw(c-6.753,6.753) v1(-5.08,5.08) ; v1(21.717,-10.541) 21.737,-10.521 J13.1@23.558,-10.521
AOUT: C6.1 J1.31 R58.1 | length 38.3
  Top w0.254: C6.1@13.785,-10.287 13.787,-10.289 v1(14.351,-10.289)
  GND w0.254: v1(-0.793,3.012) -0.793,2.97 3.536,-1.358 ccw(c5.969,1.075) 5.969,-2.366 6.731,-2.366 cw(c6.731,-5.613) 9.027,-3.317 10.411,-4.702 ; 10.413,-4.703 cw(c8.565,-6.548) 11.176,-6.548 ccw(c12.543,-6.548) 11.575,-7.513 ; 11.576,-7.514 v1(14.351,-10.289)
  Bottom w0.254: J1.31@-15.125,6.35 -7.167,6.35 cw(c-7.167,-0.88) -2.056,4.234 -0.835,3.012 v1(-0.793,3.012) ; v1(14.351,-10.289) 15.387,-10.289 R58.1@15.446,-10.229
AOUT0_CON: C10.2 J13.3 R58.2 | length 11.2
  Top w0.254: v1(25.126,-8.021) 26.59,-8.021 26.61,-8.001 C10.2@26.67,-8.061
  Bottom w0.254: R58.2@16.198,-10.287 16.728,-10.287 ccw(c16.728,-7.747) 18.524,-9.543 19.302,-8.765 cw(c21.098,-10.561) 21.098,-8.021 J13.3@23.558,-8.021 v1(25.126,-8.021)
DAC_OUT: J1.37
DC12IN: C31.2 D1.1 FB6.1 | length 5.4
  Top w0.6: FB6.1@-13.699,-22.805 -11.8,-22.805 -11.259,-22.264 ; C31.2@-11.274,-23.33 -11.259,-23.315 -11.259,-22.264 ; D1.1@-11.259,-20.574 -11.259,-22.264
DC12IN_CON: C29.2 C30.2 FB6.2 J3.1 | length 6.5
  Top w0.4: C29.2@-17.742,-22.584 FB6.2@-16.032,-22.584
  Top w0.6: C30.2@-16.014,-25 FB6.2@-16.014,-22.961
  Top w1: FB6.2@-15.858,-22.805 v1(-15.875,-21.704) v1(-15.546,-20.955)
  Bottom w1: v1(-15.875,-21.704) v1(-15.546,-20.955)
DI_CON0: J9.1 R12.1 R13.1 | length 6.3
  Bottom w0.254: J9.1@-8.904,24.756 -8.054,23.039 -8.002,22.987 R12.1@-5.022,22.987 -5.019,22.984 R13.1@-5.019,21.615
DI_D0: J2.4 PC1.4 R11.1 | length 35.2
  Top w0.254: PC1.4@-15.416,22.483 -12.823,22.483 -12.446,22.86 -9.75,22.86 -7.337,20.447 -6.223,20.447 -4.101,18.325 v1(0.577,18.325)
  Bottom w0.254: v1(0.577,18.325) R11.1@0.577,17.78 1.122,17.78 5.313,13.589 12.963,13.589 13.802,12.75 J2.4@15.125,12.75
DI_TYPE: J2.11 R10.1 | length 25.6
  Top w0.254: v1(13.916,14.043) 14.36,14.043 14.722,13.681 17.441,13.681 18.034,13.088 18.034,11.893 v1@19.177,10.75
  Bottom w0.254: R10.1@-0.947,19.431 0.207,19.431 5.01,14.628 5.01,14.534 5.501,14.043 v1(13.916,14.043) ; J2.11@18.075,10.75 v1(19.166,10.75) v1@19.177,10.75
DO_COM_CON: J9.4 PC2.4 | length 8.8
  Top w0.254: PC2.4@-14.986,16.764 -13.716,16.764 -11.43,19.05 v1(-11.43,21.209)
  Bottom w0.254: J9.4@-12.321,23.163 -11.962,22.376 -11.811,22.044 -11.687,21.773 v1(-11.43,21.209)
DO_CON0: J9.3 PC2.3 | length 8.1
  Top w0.254: PC2.3@-14.986,19.304 -13.081,19.304 -12.319,20.066 -12.319,21.14 -11.234,22.225 v1(-10.414,22.225)
  Bottom w0.254: J9.3@-11.188,23.691 -10.668,22.706 -10.522,22.429 v1(-10.414,22.225)
DO_D0: J2.8 R15.1 | length 16
  Bottom w0.254: R15.1@0.577,15.37 2.89,15.37 5.125,13.135 10.965,13.135 10.988,13.112 12.798,13.112 14.16,11.75 J2.8@15.125,11.75
EPHY_TRCT: C1.1 J1.46 T1.2 T1.7 | length 24.2
  Top w0.254: T1.2@-16.637,-13.455 -18.041,-13.455 -19.036,-12.46 v1(-19.036,-7.105) T1.7@-16.637,-7.105
  Bottom w0.254: C1.1@-21.51,-4.597 -19.061,-4.597 -19.036,-4.572 ; v1@-19.043,-7.112 v1(-19.036,-7.105) -19.036,-4.572 ; J1.46@-18.075,2.85 -19.121,2.85 -19.304,2.667 -19.304,1.401 -19.036,1.133 -19.036,-4.572
FD_SW: J1.32 J6.10 | length 39.6
  Top w0.254: v1(-17.003,6.35) -16.558,6.35 -14.758,4.55 -14.758,2.776 v1(-13.633,1.651) ; v1@-13.57,1.714 v1@-13.506,1.651 ; J6.10@2.25,-20.671 v1(2.25,-19.431)
  Bottom w0.254: J1.32@-18.075,6.35 v1(-17.003,6.35) ; v1(-13.633,1.651) -13.156,1.174 -13.156,-9.376 -3.713,-18.819 1.638,-18.819 v1(2.25,-19.431)
FOCUS_AN: J12.5 U6.6 | length 7.7
  Top w0.254: U6.6@7.437,13.314 7.437,14.803 10.15,17.516 J12.5@10.15,19.786 J12.5@10.104,19.74
FOCUS_AP: J12.6 U6.4 | length 7.6
  Top w0.254: U6.4@8.737,13.314 8.737,14.833 11.404,17.5 11.404,19.77 J12.6@11.42,19.786
FOCUS_BN: J12.3 U6.7 | length 6.8
  Top w0.254: U6.7@6.787,13.314 6.787,15.042 7.63,15.885 J12.3@7.63,19.786
FOCUS_BP: J12.4 U6.9 | length 7.9
  Top w0.254: U6.9@5.487,13.314 v1(5.487,14.732) ; v1(8.9,18.298) J12.4@8.9,19.786
  Bottom w0.254: v1(5.487,14.732) 5.487,14.885 8.154,17.552 v1(8.9,18.298)
FOCUS_CTRL_CLK: J2.23 U6.11 | length 18
  Top w0.254: U6.11@4.187,13.314 4.187,11.849 v1(4.191,11.845)
  VCC w0.254: v1(4.191,11.845) 4.726,11.845 5.901,13.02 7.452,13.02 12.164,8.309 15.939,8.309 v1(16.501,7.747)
  Bottom w0.254: v1(16.501,7.747) J2.23@18.072,7.747
FOCUS_CTRL_DIR: J2.26 U6.12 | length 15.3
  Top w0.254: v1(3.537,11.322) U6.12@3.537,13.314
  VCC w0.254: v1(3.537,11.322) 5.609,9.25 v1(9.906,9.25)
  Bottom w0.254: v1(9.906,9.25) 11.906,7.25 J2.26@15.125,7.25
FOCUS_CTRL_EN: J2.29 U6.10 | length 18.6
  Top w0.254: v1(4.826,11.303) 4.837,11.314 U6.10@4.837,13.314
  VCC w0.254: v1(4.826,11.303) 6.089,12.566 7.264,12.566 11.976,7.855 15.718,7.855 16.346,7.227 16.362,7.227 16.988,6.6 v1(16.988,6.25)
  Bottom w0.254: v1(16.988,6.25) J2.29@18.075,6.25
FOCUS_CTRL_NFAULT: J2.21 R35.1 U6.16 | length 17.7
  Top w0.254: v1(5.487,6.096) U6.16@5.487,7.514
  VCC w0.254: v1(11.176,10.16) 12.573,8.763 16.475,8.763 v1(16.988,8.25)
  Bottom w0.254: R35.1@5.461,5.149 5.487,5.175 v1(5.487,6.096) 5.487,6.463 9.184,10.16 v1(11.176,10.16) ; v1(16.988,8.25) J2.21@18.075,8.25
FOCUS_CTRL_NSLEEP: J2.24 U6.1 | length 8.8
  Top w0.254: v1(10.668,11.787) 10.687,11.806 U6.1@10.687,13.314
  Bottom w0.254: v1(10.668,11.787) 10.668,11.575 11.961,10.282 11.961,8.622 12.833,7.75 J2.24@15.125,7.75
GND: BC1.1 BC2.1 BC3.1 BC4.1 BC5.1 BC6.1 BC7.1 BC9.2 BC10.2 BC11.1 C1.2 C2.1 C3.1 C4.1 C5.1 C7.2 C11.2 C12.2 C13.2 C16.2 C17.2 C22.2 C23.2 C24.2 C25.2 C26.2 C27.2 C28.2 C29.1 C30.1 C31.1 C32.2 C33.2 C34.2 J1.5 J1.9 J1.17 J1.27 J1.29 J1.33 J1.41 J1.43 J2.2 J2.12 J2.34 J2.48 J2.49 J3.2 J3.9 J3.10 J4.5 J4.8 J4.10 J4.15 J4.20 J4.25 J4.26 J4.33 J4.39 J4.40 J4.M1 J4.M2 J4.M3 J4.M4 J5.2 J5.M1 J5.M2 J6.6 J6.M1 J6.M2 J6.M3 J6.M4 J9.2 J9.M1 J9.M2 J11.4 J11.5 J11.6 J12.9 J12.10 J13.2 J13.4 J13.5 LF1.9 LF1.10 MH1.1 MH2.1 MH3.1 MH4.1 pad.0 PC1.2 PC1.3 Q1.2 Q2.2 Q4.2 R8.2 R24.1 R30.1 R37.2 R38.1 R39.1 R40.2 R43.1 R44.1 R45.2 R46.1 R47.1 R48.1 R51.2 R52.1 R53.1 R55.1 R56.1 U3.5 U4.21 U4.25 U5.4 U6.21 U6.25 U9.2 U9.4
  other v1: -4.572,-30.214 -8.235,-29.845 7.62,-29.238 5.06,-29.21 6.35,-29.21 8.89,-29.21 -9.529,-28.599 -10.795,-28.575 -8.255,-28.575 -5.063,-27.94 -13.335,-27.305 -12.094,-27.305 -10.809,-27.305 -9.529,-27.305 -8.255,-27.305 11.049,-26.924 -15.234,-26.67 -5.08,-26.67 -13.346,-26.035 -12.068,-26.035 -10.795,-26.035 15.873,-26.035 11.049,-25.781 -5.08,-25.4 -17.398,-25.127 -13.322,-24.765 12.043,-24.765 13.33,-24.765 17.805,-24.765 19.561,-23.495 -4.128,-23.271 12.073,-22.86 13.33,-22.86 -20.574,-22.485 21.045,-22.098 -13.268,-21.114 -21.956,-20.955 13.337,-20.955 -4.128,-20.671 22.479,-20.602 -13.814,-20.32 -16.296,-19.508 -13.408,-19.508 0.25,-19.431 -23.495,-19.179 13.335,-19.074 23.944,-19 2.159,-18.288 23.944,-17.742 -24.722,-17.526 -8.001,-17.526 -3.429,-17.398 -10.015,-17.272 2.159,-17.272 13.335,-17.153 25.4,-17.117 24.384,-16.637 -26.035,-16.002 -13.426,-16.002 -24.13,-15.875 -22.862,-15.875 -8.509,-15.621 13.335,-15.283 -9.962,-15.236 26.67,-15.24 -13.322,-14.602 -1.074,-14.154 -11.32,-13.788 15.24,-13.757 16.891,-13.757 -21.59,-13.462 11.41,-13.315 13.33,-13.336 20.193,-13.335 -27.599,-13.217 -12.282,-12.954 -1.524,-12.7 -0.127,-12.7 20.955,-12.683 3.537,-12.353 -22.155,-11.43 -0.127,-11.43 1.76,-11.43 20.955,-11.43 -24.398,-10.922 -10.287,-10.795 -5.273,-10.795 3.704,-10.795 5.245,-10.795 -28.602,-10.668 -19.721,-10.16 -18.231,-10.161 -15.494,-10.159 -24.398,-9.779 -29.268,-8.89 -20.918,-8.89 -19.688,-8.88 -0.117,-7.874 -22.225,-7.619 -20.955,-7.605 29.671,-7.239 24.511,-6.477 -22.225,-6.35 -20.955,-6.35 -19.688,-6.35 -18.213,-6.35 -30.099,-5.697 17.78,-5.689 20.66,-5.689 7.214,-5.461 -14.915,-5.08 -8.89,-5.068 -7.965,-5.068 -0.031,-4.995 9.576,-4.953 30.225,-4.953 -28.448,-4.699 -26.035,-4.699 24.13,-4.496 -2.231,-4.191 -8.89,-3.813 -7.916,-3.813 22.953,-3.81 -22.225,-2.54 -20.32,-2.54 -18.213,-2.54 21.973,-2.308 10.742,-1.905 19.127,-1.651 -6.35,-1.279 -7.62,-1.266 -5.091,-1.27 12.075,-0.635 3.556,-0.405 7.127,-0.254 -23.114,0 21.743,0.362 -14.701,0.453 -19.812,0.635 -7.618,0.634 -6.35,0.634 -5.072,0.634 -3.81,0.634 -2.538,0.634 -1.27,0.634 -18.231,1.016 21.731,1.27 -1.27,1.905 -9.962,2.032 -20.053,2.586 -13.393,3.556 -16.446,4.429 2.319,4.616 30.099,5.002 -30.099,5.098 12.156,5.334 -13.393,5.408 13.142,5.425 27.813,5.418 12.686,6.477 -23.876,6.9 2.319,6.909 29.586,7.048 -16.367,7.068 -29.718,7.121 0.714,8.001 28.194,8.128 -21.844,8.609 -25.4,8.9 -5.461,8.89 -0.93,8.89 29.083,8.924 -29.083,8.994 -24.13,9.525 -16.367,9.652 22.479,9.75 24.066,9.75 6.223,9.888 7.747,9.888 -12.467,10.35 16.374,10.75 24.066,10.965 7.747,10.973 6.223,10.993 22.52,10.993 2.319,11.098 -26.035,11.43 28.067,11.498 -13.335,11.864 1.227,12.607 -25.36,13.35 -27.329,13.589 15.252,14.351 -15.513,14.681 16.642,14.885 -26.289,15.24 26.375,15.321 14.351,15.4 -23.495,15.507 25.4,16.764 -16.764,16.814 -25.072,17.018 24.25,18.542 21.924,18.607 3.274,19.304 22.987,20.045 -22.87,20.193 -16.006,20.602 16.501,20.953 21.717,21.423 -21.454,21.717 0.635,22.164 4.415,22.225 20.297,22.733 -20.053,22.983 0.635,23.495 4.443,23.495 18.835,24.003 12.065,24.169 17.018,25.219 12.085,26.035 15.428,26.249 -15.367,26.289 -6.387,26.289 13.716,27.203 -13.129,27.305 12.055,27.94 -9.779,28.575 -6.059,29.845 5.969,29.895
I2C_SCL: J1.24 J5.4 | length 3.9
  Top w0.254: J5.4@-19.847,8.35 v1(-17.003,8.35)
  Bottom w0.254: J1.24@-18.075,8.35 v1(-17.003,8.35)
I2C_SDA: J1.26 J5.5 | length 6.3
  Top w0.254: J5.5@-19.897,9.57 -17.214,9.57 -16.51,8.866 v1(-16.51,7.85)
  Bottom w0.254: J1.26@-18.075,7.85 v1(-16.51,7.85)